# Altium PCB Motor_Driver_Model_D203.PcbDoc (part 3 of 4)
Units mm, origin at the board's own origin, x right, y up, seen from the top; angles counter-clockwise.
Board outline 50 x 35 mm, 4 copper layers (1-SIG-TOP, 2-SIG-GND, 3-SIG-PWR, 4-SIG-BOT), stack 0.96 mm thick; 141 components, 74 nets, 356 pads, 1049 vias.
Unrouted connection lines stored in the file: 1.
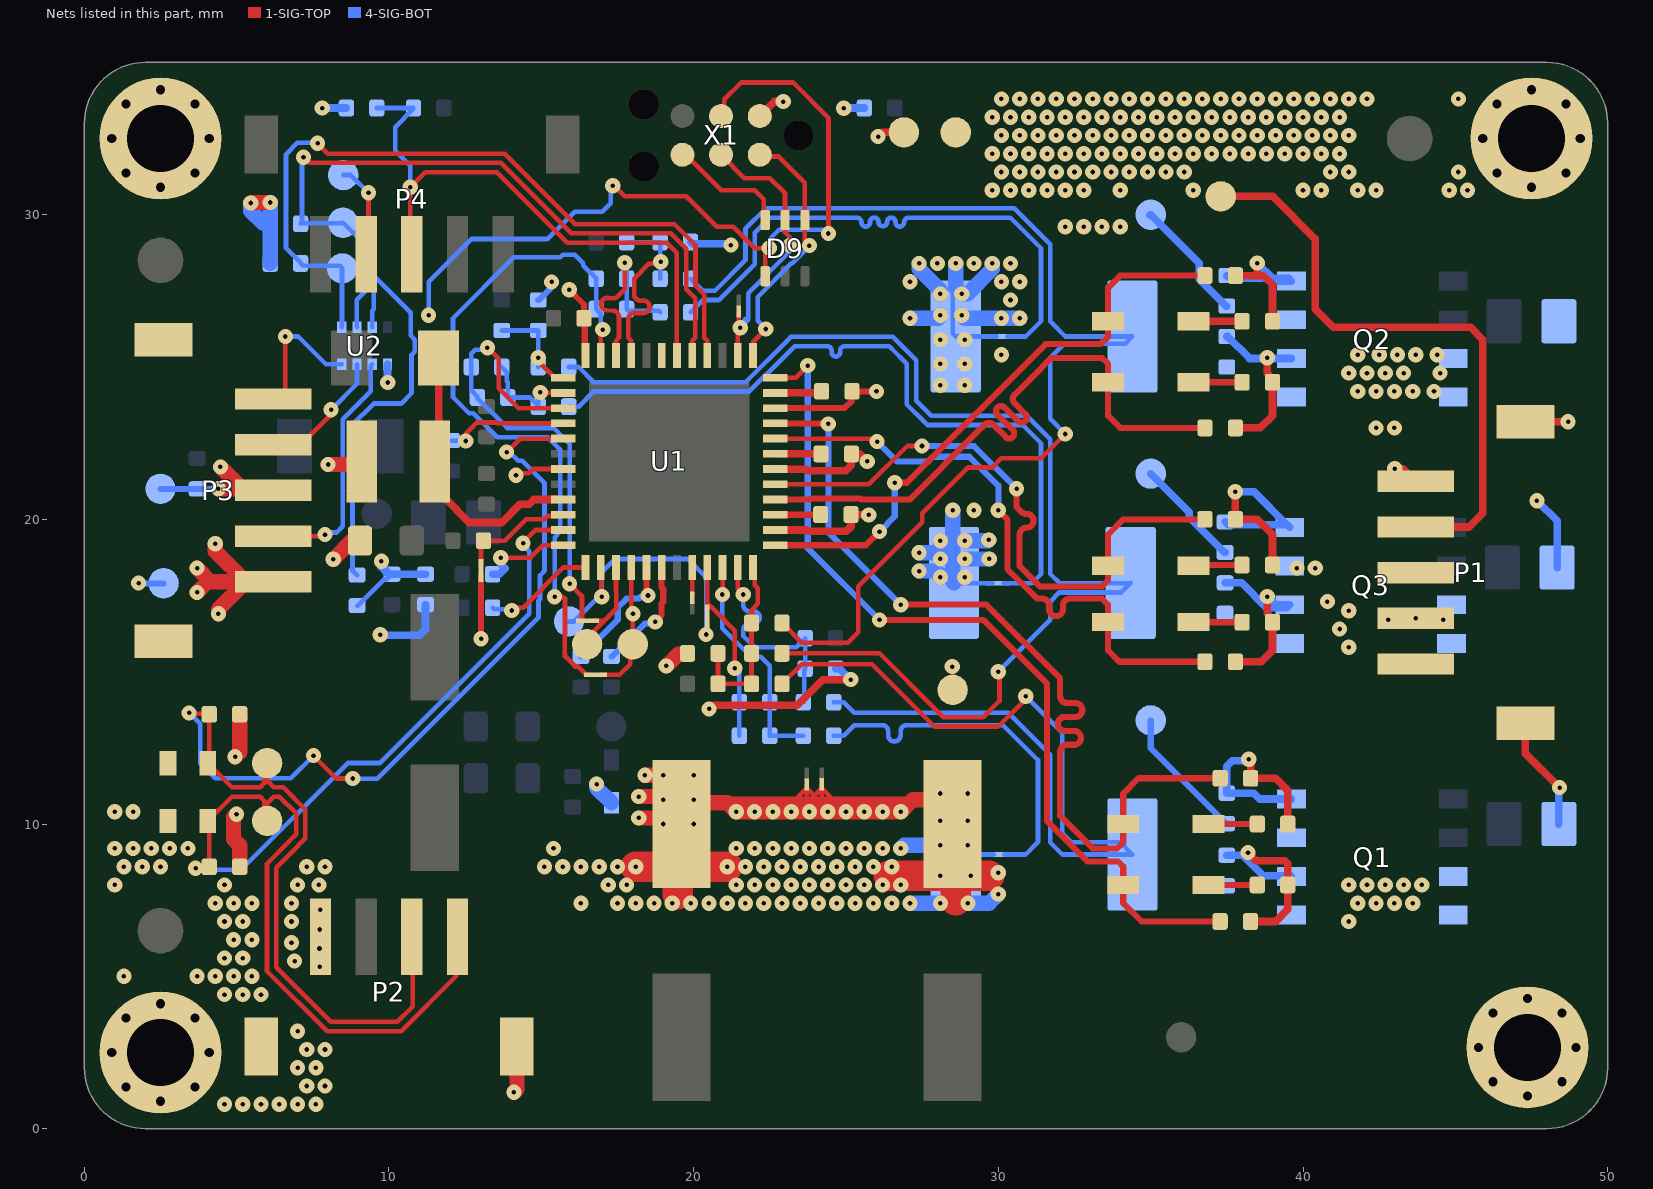
[diagram p4: the nets of this part, all layers, seen from the top]

## Part data (continued)
R26 R41 R44 R45: library part "RES SMD 0 OHM JUMPER 1/16W 0402", "0 Ohms Jumper 0.063W, 1/16W Chip Resistor 0402 (1005 Metric) Moisture Resistant Thick Film", Case Code (Imperial)=0402, Case Code (Metric)=1005, Manufacturer=Yageo, Manufacturer Part Number=RC0402JR-070RL, Max Operating Temperature=155°C, Max Power Dissipation=63mW, Min Operating Temperature=-55°C, Package Quantity=1, Power Rating=62.5mW, Supplier Part Number 1=311-0.0JRCT-ND, Temperature Coefficient=200ppm/°C, Tolerance=5%, Voltage Rating=50V, Case/Package=0402, ClassName=USB_SW, ComponentLink1Description=http://www.yageo.com/documents/recent/PYu-RC_Group_51_RoHS_L_10.pdf?src-supplier=Digi-Key, ComponentLink1URL=http://www.yageo.com/documents/recent/PYu-RC_Group_51_RoHS_L_10.pdf?src-supplier=Digi-Key, ComponentLink2Description=http://www.yageo.com/documents/recent/PYu-RC0402_51_RoHS_L_6.pdf?src-supplier=Avnet+Europe, ComponentLink2URL=http://www.yageo.com/documents/recent/PYu-RC0402_51_RoHS_L_6.pdf?src-supplier=Avnet+Europe, ComponentLink3Description=http://www.farnell.com/datasheets/1018594.pdf?src-supplier=Element14, ComponentLink3URL=http://www.farnell.com/datasheets/1018594.pdf?src-supplier=Element14, ComponentLink4Description=https://www.verical.com/server-webapp/html/getDatasheet?partID=326379&src-supplier=Verical, ComponentLink4URL=https://www.verical.com/server-webapp/html/getDatasheet?partID=326379&src-supplier=Verical, ComponentLink5Description=http://www.farnell.com/datasheets/2167052.pdf?src-supplier=Element14, ComponentLink5URL=http://www.farnell.com/datasheets/2167052.pdf?src-supplier=Element14, Composition="Thick Film", Contact Plating=Tin,Matte, Depth=0.5mm, Features="Moisture Resistant", Height=0.016inch, Lead Free="Lead Free", Length=1mm, Military Standard=Not, Mount="Surface Mount", Number of Terminations=2, Packaging="Tape and Reel", Pricing 1="1=0.1, 10=0.013, 25=0.0092, 50=0.0072, 100=0.0053, 250=0.004, 500=0.0032, 1000=0.0024, 5000=0.0017 (USD)", Radiation Hardening=No, REACH SVHC=Unknown, Stock 1=46057148, Supplier 1=Digi-Key, Termination=SMD/SMT, Width=0.02inch
R27 R28 R30: library part "RES SMD 1K OHM 1% 1/16W 0402", "13.7 kOhms ±1% 0.100W, 1/10W Chip Resistor 0402 (1005 Metric) Moisture Resistant Thick Film", Case Code (Imperial)=0402, Case Code (Metric)=1005, Manufacturer="Panasonic Electronic Components", Manufacturer Part Number=ERJ-2RKF1372X, Max Operating Temperature=155°C, Min Operating Temperature=-55°C, Power Rating=100mW, Resistance=13.7kR, Supplier Part Number 1=P13.7KLDKR-ND, Temperature Coefficient=100ppm/°C, Tolerance=1%, Voltage Rating=50V, Case/Package=0402, Composition="Thick Film", Datasheet=https://industrial.panasonic.com/cdbs/www-data/pdf/RDA0000/AOA0000C304.pdf, Depth=0.5mm, Height=0.32mm, Lead Free="Lead Free", Length=1mm, Military Standard=Not, Mount="Surface Mount", Number of Pins=2, Packaging="Tape and Reel", Pricing 1="1=0.1, 10=0.015, 100=0.0062, 1000=0.0028, 2500=0.0024, 5000=0.002 (USD)", REACH SVHC=Unknown, Stock 1=9574509, Supplier 1=Digi-Key, Termination=SMD/SMT, Voltage Rating (DC)=50V, Width=0.5mm
R31: library part "RES SMD 2.2 OHM 1% 1/16W 0402", "24.3 kOhms ±1% 0.100W, 1/10W Chip Resistor 0402 (1005 Metric) Moisture Resistant Thick Film", Case Code (Imperial)=0402, Case Code (Metric)=1005, Manufacturer="Panasonic Electronic Components", Manufacturer Part Number=ERJ-2RKF2432X, Max Operating Temperature=155°C, Min Operating Temperature=-55°C, Power Rating=100mW, Resistance=24.3kR, Supplier Part Number 1=P24.3KLCT-ND, Temperature Coefficient=200ppm/°C, Tolerance=1%, Voltage Rating=50V, Case/Package=0402, Composition="Thick Film", Datasheet=https://industrial.panasonic.com/cdbs/www-data/pdf/RDA0000/AOA0000C304.pdf, Depth=0.5mm, Height=0.32mm, Lead Free="Lead Free", Length=1mm, Mount="Surface Mount", Number of Pins=2, Packaging="Tape and Reel", Pricing 1="1=0.1, 10=0.023, 100=0.0093, 1000=0.0042, 2500=0.0036, 5000=0.003 (USD)", REACH SVHC="No SVHC", Stock 1=552576, Supplier 1=Digi-Key, Termination=SMD/SMT, Voltage Rating (DC)=50V, Width=0.5mm
R32 R35 R36 R37 R38 R39: "10 Ohms ±1% 0.063W, 1/16W Chip Resistor 0402 (1005 Metric) Automotive AEC-Q200, Moisture Resistant Thick Film", Case Code (Imperial)=0402, Case Code (Metric)=1005, Manufacturer=Yageo, Manufacturer Part Number=AC0402FR-0710RL, Max Operating Temperature=155°C, Max Power Dissipation=63mW, Min Operating Temperature=-55°C, Power Rating=62.5mW, Resistance="10 Ohm", Supplier Part Number 1=YAG3438CT-ND, Temperature Coefficient=200ppm/°C, Tolerance=1%, Voltage Rating=50V, Case/Package=0402, ClassName=STM32G473CETx, ComponentLink1Description=http://www.yageo.com/documents/recent/PYu-AC_51_RoHS_L_2_revised.pdf?src-supplier=Future+Electronics, ComponentLink1URL=http://www.yageo.com/documents/recent/PYu-AC_51_RoHS_L_2_revised.pdf?src-supplier=Future+Electronics, ComponentLink2Description=http://www.yageo.com/NewPortal/yageodocoutput?fileName=/pdf/R-Chip/PYu-AC_51_RoHS_L_6.pdf&src-supplier=Digi-Key, ComponentLink2URL=http://www.yageo.com/NewPortal/yageodocoutput?fileName=/pdf/R-Chip/PYu-AC_51_RoHS_L_6.pdf&src-supplier=Digi-Key, ComponentLink3Description=http://www.mouser.com/ds/2/447/yageodocoutput-1111992.pdf?src-supplier=Mouser, ComponentLink3URL=http://www.mouser.com/ds/2/447/yageodocoutput-1111992.pdf?src-supplier=Mouser, Composition="Thick Film", Features="Moisture Resistant,Automotive AEC-Q200", Height=0.015inch, Lead Free="Lead Free", Length=0.039inch, Mount="Surface Mount", Number of Terminations=2, Packaging="Tape and Reel", Pricing 1="1=0.1, 10=0.03, 100=0.012, 1000=0.0054, 2500=0.0047, 5000=0.0039 (USD)", Stock 1=212882, Supplier 1=Digi-Key, Termination=SMD/SMT, Width=0.02inch
R33: library part "RES SMD 2.26 OHM 1% 1/10W 0603", "169 kOhms ±1% 0.125W, 1/8W Chip Resistor 0603 (1608 Metric) Automotive AEC-Q200 Thick Film", Case Code (Imperial)=0603, Case Code (Metric)=1608, Manufacturer="Vishay Dale", Manufacturer Part Number=TNPW0603169KBEEA, Max Operating Temperature=155°C, Max Power Dissipation=125mW, Min Operating Temperature=-55°C, Package Quantity=5000, Resistance=169kR, Supplier Part Number 1=541-4530-1-ND, Temperature Coefficient=100ppm/°C, Tolerance=1%, Voltage Rating=75V, Case/Package=0603, Composition="Thick Film", Contact Plating=Tin, Datasheet=https://www.vishay.com/docs/28758/tnpw_e3.pdf, Depth=0.85mm, Features="Automotive AEC-Q200", Height=0.02inch, Lead Free="Lead Free", Length=1.55mm, Military Standard=Not, Mount="Surface Mount", Number of Terminations=2, Packaging="Tape and Reel", Power Rating=125mW, Pricing 1="1=0.1, 10=0.04, 100=0.0164, 1000=0.0074, 2500=0.0064 (USD)", Radiation Hardening=No, Stock 1=18141, Supplier 1=Digi-Key, Termination=SMD/SMT, Weight=7.1E-05oz, Width=0.85mm
R34: library part "RES SMD 2.26 OHM 1% 1/10W 0603", "9.31 kOhms ±1% 0.125W, 1/8W Chip Resistor 0603 (1608 Metric) Automotive AEC-Q200 Thick Film", Case Code (Imperial)=0603, Case Code (Metric)=1608, Manufacturer="Vishay Dale", Manufacturer Part Number=TNPW06039K31BEEA, Max Operating Temperature=155°C, Max Power Dissipation=125mW, Min Operating Temperature=-55°C, Package Quantity=5000, Resistance=9.31kR, Supplier Part Number 1=541-TNPW06039K31BEEACT-ND, Temperature Coefficient=100ppm/°C, Tolerance=1%, Voltage Rating=75V, Case/Package=0603, Composition="Thick Film", Contact Plating=Tin, Datasheet=https://www.vishay.com/docs/28758/tnpw_e3.pdf, Depth=0.85mm, Features="Automotive AEC-Q200", Height=0.02inch, Lead Free="Lead Free", Length=1.55mm, Military Standard=Not, Mount="Surface Mount", Number of Terminations=2, Packaging="Tape and Reel", Power Rating=125mW, Pricing 1="1=0.1, 10=0.04, 100=0.0164, 1000=0.0074, 2500=0.0064 (USD)", Radiation Hardening=No, Stock 1=18141, Supplier 1=Digi-Key, Termination=SMD/SMT, Weight=7.1E-05oz, Width=0.85mm
R40: "10 kOhms ±1% 0.063W, 1/16W Chip Resistor 0402 (1005 Metric) Moisture Resistant Thick Film", Case Code (Imperial)=0402, Case Code (Metric)=1005, Manufacturer=Yageo, Manufacturer Part Number=RC0402FR-0710KP, Max Operating Temperature=155°C, Max Power Dissipation=63mW, Min Operating Temperature=-55°C, Resistance=10kR, Supplier Part Number 1=YAG1249CT-ND, Temperature Coefficient=150ppm/°C, Tolerance=1%, Case/Package=0402, ComponentLink1Description=http://www.yageo.com/NewPortal/yageodocoutput?fileName=/pdf/R-Chip/PYu-RC_51_RoHS_P_0.pdf&src-supplier=Digi-Key, ComponentLink1URL=http://www.yageo.com/NewPortal/yageodocoutput?fileName=/pdf/R-Chip/PYu-RC_51_RoHS_P_0.pdf&src-supplier=Digi-Key, Composition="Thick Film", Features="Moisture Resistant", Height=0.016inch, Length=0.039inch, Mount="Surface Mount", Number of Terminations=2, Packaging="Tape and Reel", Pricing 1="1=0.1, 10=0.035, 100=0.014, 1000=0.0063, 2500=0.0055, 5000=0.0045 (USD)", Stock 1=839368, Supplier 1=Digi-Key, Width=0.02inch
R42: "100 Ohms ±1% 0.063W, 1/16W Chip Resistor 0402 (1005 Metric) Moisture Resistant Thick Film", Case Code (Imperial)=0402, Case Code (Metric)=1005, Manufacturer=Yageo, Manufacturer Part Number=RC0402FR-07100RL, Max Operating Temperature=155°C, Min Operating Temperature=-55°C, Power Rating=62.5mW, Resistance=100R, Supplier Part Number 1=311-100LRDKR-ND, Temperature Coefficient=100ppm/°C, Tolerance=1%, Voltage Rating=50V, Case/Package=0402, ComponentLink1Description=http://www.farnell.com/datasheets/2167052.pdf?src-supplier=Element14, ComponentLink1URL=http://www.farnell.com/datasheets/2167052.pdf?src-supplier=Element14, ComponentLink2Description=http://www.yageo.com/documents/recent/PYu-RC_Group_51_RoHS_L_9.pdf?src-supplier=Mouser, ComponentLink2URL=http://www.yageo.com/documents/recent/PYu-RC_Group_51_RoHS_L_9.pdf?src-supplier=Mouser, ComponentLink3Description=http://www.yageo.com/documents/recent/PYu-RC0402_51_RoHS_L_6_r.pdf?src-supplier=Future+Electronics, ComponentLink3URL=http://www.yageo.com/documents/recent/PYu-RC0402_51_RoHS_L_6_r.pdf?src-supplier=Future+Electronics, ComponentLink4Description=https://www.verical.com/server-webapp/html/getDatasheet?partID=329466&src-supplier=Verical, ComponentLink4URL=https://www.verical.com/server-webapp/html/getDatasheet?partID=329466&src-supplier=Verical, ComponentLink5Description=http://www.farnell.com/datasheets/1018594.pdf?src-supplier=Element14, ComponentLink5URL=http://www.farnell.com/datasheets/1018594.pdf?src-supplier=Element14, ComponentLink6Description=http://documents.rs-components.com/techlib://itc_doclist_GB.htm?stockno=6185810&src-supplier=RSComponents, ComponentLink6URL=http://documents.rs-components.com/techlib://itc_doclist_GB.htm?stockno=6185810&src-supplier=RSComponents, Composition="Thick Film", Depth=0.5mm, Height=0.32mm, Lead Free="Lead Free", Length=1mm, Military Standard=Not, Mount="Surface Mount", Number of Pins=2, Packaging="Tape and Reel", Pricing 1="1=0.1, 10=0.016, 100=0.0064, 1000=0.0029, 2500=0.0025, 5000=0.0021 (USD)", REACH SVHC="No SVHC", Stock 1=16989760, Supplier 1=Digi-Key, Termination=SMD/SMT, Voltage Rating (DC)=50V, Width=0.5mm
R43: library part "RES SMD 54.9K OHM 1% 1/16W 0402", "39 kOhms ±1% 0.100W, 1/10W Chip Resistor 0402 (1005 Metric) Moisture Resistant Thick Film", Case Code (Imperial)=0402, Case Code (Metric)=1005, Manufacturer="Panasonic Electronic Components", Manufacturer Part Number=ERJ-2RKF3902X, Max Operating Temperature=155°C, Max Power Dissipation=100mW, Min Operating Temperature=-55°C, Resistance=39kR, Supplier Part Number 1=P39.0KLCT-ND, Temperature Coefficient=100ppm/°C, Tolerance=1%, Voltage Rating=50V, Case/Package=0402, Composition="Thick Film", Contact Plating=Tin,Matte, Datasheet=https://industrial.panasonic.com/cdbs/www-data/pdf/RDA0000/AOA0000C304.pdf, Depth=0.5mm, Features="Moisture Resistant", Height=0.016inch, Lead Free="Lead Free", Length=1mm, Military Standard=Not, Mount="Surface Mount", Number of Terminations=2, Packaging="Tape and Reel", Power Rating=100mW, Pricing 1="1=0.1, 10=0.015, 100=0.0062, 1000=0.0028, 2500=0.0024, 5000=0.002 (USD)", Stock 1=707322, Supplier 1=Digi-Key, Termination=SMD/SMT, Voltage Rating (DC)=50V, Width=0.02inch
R46 R47 R48 R49 R50 R51: "75 kOhms ±1% 0.063W, 1/16W Chip Resistor 0402 (1005 Metric) Automotive AEC-Q200 Thick Film", Case Code (Imperial)=0402, Case Code (Metric)=1005, Manufacturer="Stackpole Electronics", Manufacturer Part Number=RMCF0402FT75K0, Max Operating Temperature=155°C, Max Power Dissipation=63mW, Min Operating Temperature=-55°C, Resistance=75kR, Supplier Part Number 1=RMCF0402FT75K0CT-ND, Temperature Coefficient=100ppm/°C, Tolerance=1%, Case/Package=0402, ClassName=STM32G473CETx, ComponentLink1Description=https://www.seielect.com/catalog/SEI-Packaging.pdf?src-supplier=Digi-Key, ComponentLink1URL=https://www.seielect.com/catalog/SEI-Packaging.pdf?src-supplier=Digi-Key, ComponentLink2Description=http://www.seielect.com/Catalog/Sei-RMC.pdf?src-supplier=Future+Electronics, ComponentLink2URL=http://www.seielect.com/Catalog/Sei-RMC.pdf?src-supplier=Future+Electronics, ComponentLink3Description=https://www.seielect.com/catalog/SEI-RMCF_RMCP.pdf?src-supplier=Avnet, ComponentLink3URL=https://www.seielect.com/catalog/SEI-RMCF_RMCP.pdf?src-supplier=Avnet, ComponentLink4Description=http://components.arrow.com/part/dataview/47811039S7743759N1174?src-supplier=Arrow, ComponentLink4URL=http://components.arrow.com/part/dataview/47811039S7743759N1174?src-supplier=Arrow, ComponentLink5Description=https://www.verical.com/server-webapp/html/getDatasheet?partID=492569&src-supplier=Verical, ComponentLink5URL=https://www.verical.com/server-webapp/html/getDatasheet?partID=492569&src-supplier=Verical, Composition="Thick Film", Contact Plating=Tin,Matte, Depth=0.5mm, Features="Automotive AEC-Q200", Height=0.016inch, Lead Free="Lead Free", Length=0.039inch, Military Standard=Not, Mount="Surface Mount", Number of Terminations=2, Packaging="Tape and Reel", Power Rating=63mW, Pricing 1="1=0.1, 10=0.014, 100=0.0058, 1000=0.0026, 2500=0.0023, 5000=0.0019 (USD)", Radiation Hardening=No, Stock 1=24693, Supplier 1=Digi-Key, Width=0.02inch
R52 R53 R54 R55 R56: "0 Ohms Jumper 0.063W, 1/16W Chip Resistor 0402 (1005 Metric) Moisture Resistant Thick Film", Case Code (Imperial)=0402, Case Code (Metric)=1005, Manufacturer=Yageo, Manufacturer Part Number=RC0402JR-070RL, Max Operating Temperature=155°C, Max Power Dissipation=63mW, Min Operating Temperature=-55°C, Package Quantity=1, Power Rating=62.5mW, Resistance="0 Ohm", Supplier Part Number 1=311-0.0JRCT-ND, Temperature Coefficient=200ppm/°C, Tolerance=5%, Voltage Rating=50V, Case/Package=0402, ClassName=USB_SW, ComponentLink1Description=http://www.yageo.com/documents/recent/PYu-RC_Group_51_RoHS_L_10.pdf?src-supplier=Digi-Key, ComponentLink1URL=http://www.yageo.com/documents/recent/PYu-RC_Group_51_RoHS_L_10.pdf?src-supplier=Digi-Key, ComponentLink2Description=http://www.yageo.com/documents/recent/PYu-RC0402_51_RoHS_L_6.pdf?src-supplier=Avnet+Europe, ComponentLink2URL=http://www.yageo.com/documents/recent/PYu-RC0402_51_RoHS_L_6.pdf?src-supplier=Avnet+Europe, ComponentLink3Description=http://www.farnell.com/datasheets/1018594.pdf?src-supplier=Element14, ComponentLink3URL=http://www.farnell.com/datasheets/1018594.pdf?src-supplier=Element14, ComponentLink4Description=https://www.verical.com/server-webapp/html/getDatasheet?partID=326379&src-supplier=Verical, ComponentLink4URL=https://www.verical.com/server-webapp/html/getDatasheet?partID=326379&src-supplier=Verical, ComponentLink5Description=http://www.farnell.com/datasheets/2167052.pdf?src-supplier=Element14, ComponentLink5URL=http://www.farnell.com/datasheets/2167052.pdf?src-supplier=Element14, Composition="Thick Film", Contact Plating=Tin,Matte, Depth=0.5mm, Features="Moisture Resistant", Height=0.016inch, Lead Free="Lead Free", Length=1mm, Military Standard=Not, Mount="Surface Mount", Number of Terminations=2, Packaging="Tape and Reel", Pricing 1="1=0.1, 10=0.013, 25=0.0092, 50=0.0072, 100=0.0053, 250=0.004, 500=0.0032, 1000=0.0024, 5000=0.0017 (USD)", Radiation Hardening=No, REACH SVHC=Unknown, Stock 1=46057148, Supplier 1=Digi-Key, Termination=SMD/SMT, Width=0.02inch
U1: "No Description Available", Manufacturer=STMicroelectronics, Supplier Part Number 1=43AC0300, Built_By=EMA_Jessica, ComponentLink1Description=Datasheet, ComponentLink1URL=https://www.google.com/url?sa=t&rct=j&q=&esrc=s&source=web&cd=&ved=2ahUKEwjgwpfom8rwAhVUb30KHfxED0oQFjAAegQIBhAD&url=https%3A%2F%2Fwww.st.com%2Fresource%2Fen%2Fdatasheet%2Fstspin32f0a.pdf&usg=AOvVaw3no-3pqo9JeAS3_K3kXbhn, ComponentLink2Description="Evaluation Board Schematic", ComponentLink2URL=https://www.st.com/content/ccc/resource/technical/layouts_and_diagrams/schematic_pack/group0/a9/20/bf/a8/9b/aa/43/2b/STEVAL-SPIN3202_schematics/files/steval-spin3202_schematic.pdf/jcr:content/translations/en.steval-spin3202_schematic.pdf, Copyright="Copyright (C) 2018 Accelerated Designs. All rights reserved", EVAL Kit=STEVAL-SPIN3202, Manufacturer Part Number=STSPIN32F0A, SourceLibrary=Update_to_database_2020-12-04, Supplier 1=Newark
U2: library part "FILTER RC(PI) ESD SMD  8-UFDFN EP", "RC (Pi) EMI Filter 2nd Order Low Pass 3 Channel R = 47Ohms, 100Ohms, C = 20pF  8-UFDFN Exposed Pad", Capacitance=20pF, Case/Package=SMD/SMT, Clamping Voltage=10V, Frequency=308MHz, Manufacturer="Texas Instruments", Max Operating Temperature=85°C, Min Operating Temperature=-40°C, Operating Supply Voltage=5.5V, Package Quantity=1, Supplier Part Number 1=296-28299-1-ND, ComponentLink1Description=http://www.ti.com/lit/ds/symlink/tpd3f303.pdf?src-supplier=Digi-Key, ComponentLink1URL=http://www.ti.com/lit/ds/symlink/tpd3f303.pdf?src-supplier=Digi-Key, ComponentLink2Description=http://focus.ti.com/lit/ds/symlink/tpd3f303.pdf?src-supplier=Avnet+Europe, ComponentLink2URL=http://focus.ti.com/lit/ds/symlink/tpd3f303.pdf?src-supplier=Avnet+Europe, ComponentLink3Description=https://www.verical.com/server-webapp/html/getDatasheet?partID=302817&src-supplier=Verical, ComponentLink3URL=https://www.verical.com/server-webapp/html/getDatasheet?partID=302817&src-supplier=Verical, ComponentLink4Description=http://www.farnell.com/datasheets/1558442.pdf?src-supplier=Element14, ComponentLink4URL=http://www.farnell.com/datasheets/1558442.pdf?src-supplier=Element14, Contact Plating=Gold, Depth=1.7mm, ESD Protection=Yes, Height=0.026inch, Lead Free="Lead Free", Length=2.2mm, Manufacturer Part Number=TPD3F303DPVR, Mount="Surface Mount", Number of Channels=3, Number of Pins=8, Packaging="Tape and Reel", Pricing 1="1=0.85, 10=0.812, 25=0.7856, 50=0.6414, 100=0.576, 250=0.5236, 500=0.4974, 1000=0.4451 (USD)", Radiation Hardening=No, REACH SVHC="No SVHC", Stock 1=4896, Supplier 1=Digi-Key, Termination=Flat, Width=0.063inch
X1: library part TC2030-IDC-NL, "Tag-Connect TC2030-MCP-NL (3x2 pins No Legs)", Manufacturer="Tag-Connect LLC", Manufacturer Part Number=TC2030-IDC-NL
G1 Logo1: ClassName=PCB_FEATURE

## Via types
v1: diameter 0.5, hole 0.15, 1-SIG-TOP to 4-SIG-BOT, tented both sides, 1016 vias
v2: diameter 0.605, hole 0.3, 1-SIG-TOP to 4-SIG-BOT, tented both sides, 32 vias
v3: diameter 0.5, hole 0.15, 1-SIG-TOP to 4-SIG-BOT, 1 vias

## Nets (pads, with @x,y where several pads share a name; then routed paths per layer and width w, separated by ;. In a path a pad name is that pad's centre, name@x,y a point inside that pad or via, vN(x,y) a via of type N, cw(c..) or ccw(c..) an arc to the next point about the centre after c; other vN are vias at no path point)
+3V3: 3V31.1 3V32.1 C10.2 C15.2 C20.2 C23.2 D7.1 L1.1 NT7.1 P3.3 R18.2 R19.2 R20.2 R22.2 R25.2 R31.2 R41.2 R43.2 R44.2 R45.2 U1.48 U2.5 X1.1 | length 36.6
  1-SIG-TOP w0.2: NT7.1@13.02,18.144 13.02,17.603 13.023,17.6 ; v1(13.023,16.079) 13.023,17.6 ; 13.023,17.777 13.023,17.6 ; v1(15.919,27.533) 16.4,27.052 C15.2@16.4,26.6 16.425,26.575 16.425,25.405 U1.48@16.45,25.38
  1-SIG-TOP w0.25: v1(20.505,13.776) 20.629,13.9 23.4,13.9 24.24,14.74 v1(25.159,14.74) ; X1.1@22.17,33.235 22.648,33.713 v1(22.937,33.713) ; v1(26.054,32.563) 26.192,32.7 3V32.1@26.9,32.7
  1-SIG-TOP w0.5: v1(4.4,21) P3.3@5.187,21 ; v1(4.466,21.721) P3.3@5.187,21 ; v1(4.947,12.204) 5.1,12.357 R44.2@5.1,13.6 ; v1(4.994,10.322) 4.9,10.228 4.9,9.5 5.1,9.3 R45.2@5.1,8.6 ; v1(5.461,30.383) 5.478,30.4 v1(6.1,30.4) ; v1(8,21.8) 9,21.8 L1.1@9.1,21.9 9.1,21.2 L1.1@8.85,20.95 ; v1(8.171,18.688) 8.783,19.3 C10.2@9.05,19.3 C10.2@9.075,19.325 ; v1(19.1,15.19) 19.188,15.277 19.203,15.277 19.501,15.575 19.8,15.575 R31.2@19.8,15.6 ; P3.3@5.187,21 5.237,20.95 P3.3@6.2,20.95 6.15,21 P3.3@5.187,21
  4-SIG-BOT w0.2: 3V31.1@2.5,21 C23.2@3.7,21 v1(4.4,21) ; R20.2@14.9,27.2 14.925,27.2 15.278,27.553 15.278,27.734 v1(15.336,27.791)
  4-SIG-BOT w0.25: v1(7.812,33.497) 7.814,33.5 R41.2@8.6,33.5 ; v1(9.714,16.209) 9.723,16.2 11,16.2 11.2,16.4 R43.2@11.2,17.2 ; U2.5@9.95,25.09 9.95,24.501 v1(9.96,24.491) ; R25.2@19.9,29.1 19.952,29.048 21.174,29.048 v1(21.221,29) ; R22.2@24.659,15.098 24.801,15.098 v1(25.159,14.74) ; v1(24.923,33.495) 24.927,33.5 C20.2@25.6,33.5
  4-SIG-BOT w0.5: v1(5.461,30.383) 5.461,30.12 5.855,29.725 R18.2@6.1,29.725 ; R19.2@6.1,28.4 R18.2@6.1,29.7 R18.2@6.1,29.725 ; v1(6.1,30.4) R18.2@6.1,29.725 ; v1(16.813,11.31) 16.813,11.187 D7.1@17.3,10.7
BLDC_NTC: NTC.1 P1.4 | length 20
  1-SIG-TOP w0.25: NTC.1@37.325,30.625 NTC.1@37.3,30.6 39,30.6 40.4,29.2 40.4,26.9 41,26.3 45.5,26.3 45.9,25.9 45.9,20.2 45.45,19.75 P1.4@43.7,19.75
BLDC_U: C17.2 P1.1 Q1.1S Q1.2D-A Q1.2D-B R51.2 U1.34 U.1 | length 8.2
  1-SIG-TOP w0.203: U1.34@22.68,23.65 24.95,23.65 25.2,23.9 C17.2@25.2,24.2 v1(26,24.2)
  4-SIG-BOT w0.203: U.1@35,13.4 35,12.487 37.475,10.012 R51.2@37.5,10.012
  other v1: 41.5,6.8 41.8,7.4 42.4,7.4 43,7.4 43.6,7.4 41.5,8 42.1,8 42.7,8 43.3,8 43.9,8
BLDC_V: C18.1 P1.2 Q3.1S Q3.2D-A Q3.2D-B R49.2 U1.30 V.1 | length 7.2
  1-SIG-TOP w0.25: U1.30@22.68,21.65 23.698,21.65 23.755,21.594 24.994,21.594 25.178,21.778 C18.1@25.178,22.146 25.454,22.146 v1(25.7,21.9)
  4-SIG-BOT w0.25: V.1@35,21.5 36.269,20.231 36.269,20.064 37.418,18.915 R49.2@37.443,18.915
  other v1: 41.5,15.8 41.2,16.4 42.8,16.7 44.6,16.7 43.7,16.75 41.5,17 40.8,17.3 39.8,18.4 40.4,18.4
BLDC_W: C19.1 P1.3 Q2.1S Q2.2D-A Q2.2D-B R47.2 U1.26 W.1 | length 7.6
  1-SIG-TOP w0.25: U1.26@22.68,19.65 23.696,19.65 23.743,19.604 25.004,19.604 25.164,19.764 C19.1@25.164,20.156 25.736,20.156 v1(25.745,20.146) v1(25.745,20.146)
  4-SIG-BOT w0.25: W.1@34.975,29.975 W.1@35,30 36.6,28.4 36.6,27.875 37.475,27 R47.2@37.5,27
  other v1: 42.4,23 43,23 41.8,24.2 42.4,24.2 43,24.2 43.6,24.2 44.3,24.2 41.5,24.8 42.1,24.8 42.7,24.8 43.3,24.8 44.5,24.8 41.8,25.4 42.5,25.4 43.1,25.4 43.7,25.4 44.4,25.4
BOOT_MODE: P4.3 R40.1 R41.1 U1.42 | length 19.9
  1-SIG-TOP w0.152: P4.3@10.75,28.7 10.7,28.75 v1(10.7,30.9) 11.195,31.395 13.543,31.395 15.857,29.081 19.119,29.081 19.45,28.75 U1.42@19.45,25.38
  4-SIG-BOT w0.152: R41.1@9.6,33.5 R40.1@10.8,33.5 10.8,33.475 10.2,32.875 10.2,32.1 10.7,31.6 v1(10.7,30.9)
CTRL: CTRL.1 D11.1 P2.4 R45.1 U1.11 | length 40
  1-SIG-TOP w0.152: v1(3.651,8.55) 3.676,8.575 4.075,8.575 R45.1@4.1,8.6 4.1,10.05 D11.1@4.05,10.1 4.848,10.898 5.769,10.898 5.914,10.752 5.914,10.186 CTRL.1@6,10.1 6,10.676 6.221,10.898 6.402,10.898 6.95,10.35 6.95,9.658 6.717,9.425 6.717,9.417 5.995,8.695 5.995,5.174 7.969,3.2 10.4,3.2 12.2,5 12.2,6.25 P2.4@12.25,6.3 ; v1(14.4,19.218) 14.4,19.249 14.799,19.648 U1.11@15.72,19.65 U1.11@15.72,19.65
  4-SIG-BOT w0.152: v1(3.651,8.55) 3.604,8.597 3.55,8.597 3.647,8.5 5.142,8.5 8.642,12 9.7,12 14.6,16.9 14.6,18.955 14.4,19.155 v1(14.4,19.218)
GND: C1.1 C2.1 C3.1 C21.2 C22.2 D10.2 D11.2 GND1.1 GND2.1 GND.1 MNT1.1 MNT2.1 MNT3.1 MNT4.1 NT1.2 NT2.2 NT3.2 NT10.2 NT11.2 P1.5 P1.S1 P1.S2 P2.1 P2.S1 P2.S2 P3.5 P3.S1 P3.S2 R9.1 R10.1 R15.1 | length 92.2
  1-SIG-TOP w0.152: v1(20,10.8) 20.044,10.756 20.1,10.7 20.3,10.7 23.6,10.7 ; 23.432,10.8 23.432,10.891 NT11.2@23.711,11.17 ; NT11.2@23.711,11.297 NT11.2@23.711,11.17 ; NT10.2@24.2,11.3 NT10.2@24.2,11.173 ; 24.479,10.8 24.479,10.894 NT10.2@24.2,11.173 ; v1(28.49,15.167) 28.5,15.157 GND2.1@28.5,14.4 ; C22.2@28.5,10 27.8,10.7 27.1,10.7 24.3,10.7 ; 23.6,10.7 23.906,10.7 ; 23.6,10.7 23.656,10.756 23.7,10.8 23.711,10.811 NT11.2@23.711,11.17 ; NT11.2@23.711,11.17 23.906,10.976 23.906,10.879 ; 23.906,10.7 24.3,10.7 ; 23.906,10.7 23.906,10.756 23.906,10.8 23.906,10.879 ; 23.906,10.879 NT10.2@24.2,11.173 ; NT10.2@24.2,11.173 24.2,10.8 24.3,10.7
  1-SIG-TOP w0.2: C21.2@19.6,10 20.294,10.694 20.3,10.7 C21.2@20.356,10.756 ; C21.2@20.044,10.756 C21.2@20.356,10.756 ; C22.2@27.8,10.7 27.706,10.794 27.7,10.8 24.479,10.8 24.2,10.8 ; C21.2@20.356,10.756 23.656,10.756 23.906,10.756 24.156,10.756 24.2,10.8 ; C21.2@20.356,10.756 20.4,10.8 23.432,10.8 23.7,10.8 23.906,10.8 24.2,10.8
  1-SIG-TOP w0.25: v1(43.01,21.666) 43.284,21.666 P1.5@43.7,21.25 ; P1.S1@47.3,13.3 47.3,12.314 v1(48.421,11.194) ; P1.S2@47.3,23.2 v1(48.7,23.2)
  1-SIG-TOP w0.5: v1(3.7,17.6) 4.05,17.95 4.15,17.95 ; v1(3.7,18.4) 4.15,17.95 ; v1(4.3,19.2) 4.3,18.95 P3.5@5.3,17.95 ; v1(4.4,16.9) 4.4,17.05 P3.5@5.3,17.95 ; P3.5@6.2,17.95 P3.5@5.3,17.95 ; v1(14.102,1.192) 14.2,1.291 P2.S2@14.2,2.7 ; v1(18.2,10.2) 18.9,10.2 19,10.1 v1(19,10) ; v1(18.2,10.9) 18.9,10.9 v1(19,10.8) ; v1(18.4,11.6) v1(19,11.6) ; C21.2@20.1,10.7 20.106,10.694 20.294,10.694 21.105,10.694 v1(21.4,10.4) v1(22,10.4) v1(22.6,10.4) v1(23.2,10.4) v1(23.8,10.4) v1(24.4,10.4) v1(25,10.4) v1(25.6,10.4) v1(26.2,10.4) v1(26.8,10.4) 27.1,10.7 27.195,10.794 27.706,10.794 27.894,10.794 v1(28.1,11) ; 4.15,17.95 P3.5@5.3,17.95
  1-SIG-TOP w1: v1(18.1,8.6) 19.15,8.6 C21.2@19.473,8.923 ; 19.473,7.697 C21.2@19.473,8.923 ; v1(21.1,8.6) 20.05,8.6 C21.2@19.6,9.05 ; 26.4,8.3 v1(28.1,8.3) C22.2@28.6,8.3 ; C22.2@28.5,10 28.6,9.9 C22.2@28.6,8.3 ; 28.6,7.5 C22.2@28.6,8.3 ; 29.7,8.3 v1(29.1,8.3) C22.2@28.6,8.3 ; C21.2@19.473,8.923 19.473,9.873 C21.2@19.6,10 C21.2@19.6,9.05 ; C21.2@19.473,8.923 C21.2@19.6,9.05
  4-SIG-BOT w0.152: v1@28.5,28.3 28.5,26.1 R10.1@28.6,26 NT2.2@29.944,26 ; R9.1@28.6,9 NT1.2@29.844,9 ; R15.1@28.627,18 R15.1@28.543,17.915 28.558,17.9 NT3.2@29.81,17.9
  4-SIG-BOT w0.2: v1(1.782,17.908) 1.791,17.9 GND1.1@2.6,17.9
  4-SIG-BOT w0.25: v1(47.678,20.612) 48.343,19.947 C2.1@48.343,18.415 ; C1.1@48.4,10 48.4,11.173 v1(48.421,11.194)
  4-SIG-BOT w0.5: v1(26.8,8) 26.903,8.103 28.025,8.103 28.1,8.178 v1(28.1,8.3) ; v1(26.8,9.2) 26.9,9.3 v1(28.1,9.3) ; v1@27.1,7.4 v1(28.1,7.4) ; v1(27.1,26.6) 28.025,26.6 28.1,26.675 v1(28.1,26.7) ; v1(27.4,28.4) 27.4,28.215 28.1,27.515 v1(28.1,27.4) ; v1(27.4,18.3) 27.968,18.3 28.1,18.168 v1(28.1,18.1) ; v1(27.4,18.9) R15.1@27.968,18.9 ; v1(28.1,10.1) v1(28.1,11) ; v1(28.1,18.7) 28.1,18.768 R15.1@27.968,18.9 ; v1(28.1,19.3) 28.1,19.032 R15.1@27.968,18.9 ; v1(28.5,20.3) 28.5,17.958 R15.1@28.543,17.915 ; v1(28.6,28.4) 28.6,27.59 28.79,27.4 v1(28.8,27.4) 28.985,27.4 29.8,28.215 v1(29.8,28.4) ; v1(28.8,26.7) 28.9,26.6 v1(30.1,26.6) v1(30.7,26.6) ; v1(28.9,18.7) v1(29.7,18.7) ; v1(28.9,19.3) 29.663,19.3 v1(29.687,19.324) ; v1(29,7.4) 29.7,7.4 v1(30,7.7) ; v1(29.1,8.3) 29.1,8.325 29.175,8.4 v1(30,8.4)
  other v1: 4.6,0.8 5.2,0.8 5.8,0.8 6.4,0.8 7,0.8 7.6,0.8 7.3,1.4 7.9,1.4 7,2 7.6,2 7.3,2.6 7.9,2.6 7,3.2 4.6,4.4 5.2,4.4 5.8,4.4 1.3,5 3.7,5 4.3,5 4.9,5 5.5,5 7.73,5.314 6.9,5.5 4.6,5.6 5.2,5.6 7.719,5.914 6.8,6.1 4.9,6.2 5.5,6.2 7.724,6.537 4.6,6.8 5.2,6.8 6.8,6.8 7.741,7.181 4.3,7.4 4.9,7.4 5.5,7.4 6.8,7.4 16.3,7.4 17.5,7.4 18.1,7.4 18.7,7.4 19.3,7.4 19.9,7.4 20.5,7.4 21.1,7.4 21.7,7.4 22.3,7.4 22.9,7.4 23.5,7.4 24.1,7.4 24.7,7.4 25.3,7.4 25.9,7.4 26.5,7.4 27.1,7.4 1,8 4.6,8 7,8 7.7,8 17.2,8 17.8,8 21.4,8 22,8 22.6,8 23.2,8 23.8,8 24.4,8 25,8 25.6,8 26.2,8 1.3,8.6 1.9,8.6 2.5,8.6 7.3,8.6 7.9,8.6 15.1,8.6 15.7,8.6 16.3,8.6 16.9,8.6 17.5,8.6 21.7,8.6 22.3,8.6 22.9,8.6 23.5,8.6 24.1,8.6 24.7,8.6 25.3,8.6 25.9,8.6 26.5,8.6 1,9.2 1.6,9.2 2.2,9.2 2.8,9.2 3.4,9.2 15.4,9.2 21.4,9.2 22,9.2 22.6,9.2 23.2,9.2 23.8,9.2 24.4,9.2 25,9.2 25.6,9.2 26.2,9.2 29,9.3 20,10 29,10.1 1,10.4 1.6,10.4 29,11 20,11.6 28.9,18.1 29.2,20.3 28.1,24.4 28.9,24.4 28.1,25.1 28.9,25.1 30.1,25.4 28.1,25.9 28.9,25.9 30.4,27.2 27.1,27.8 30.1,27.8 30.7,27.8 28,28.4 29.2,28.4 30.4,28.4 32.2,29.6 32.8,29.6 33.4,29.6 34,29.6 29.8,30.799 30.4,30.799 31,30.799 31.6,30.799 32.2,30.799 32.8,30.799 34,30.799 36.4,30.799 40,30.799 40.6,30.799 41.8,30.799 42.4,30.799 44.8,30.799 45.4,30.799 30.1,31.399 30.7,31.399 31.3,31.399 31.9,31.399 32.5,31.399 33.1,31.399 33.7,31.399 34.3,31.399 34.9,31.399 35.5,31.399 36.1,31.399 40.9,31.399 41.5,31.399 45.1,31.399 29.8,31.999 30.4,31.999 31,31.999 31.6,31.999 32.2,31.999 32.8,31.999 33.4,31.999 34,31.999 34.6,31.999 35.2,31.999 35.8,31.999 36.4,31.999 37,31.999 37.6,31.999 38.2,31.999 38.8,31.999 39.4,31.999 40,31.999 40.6,31.999 41.2,31.999 30.1,32.599 30.7,32.599 31.3,32.599 31.9,32.599 32.5,32.599 33.1,32.599 33.7,32.599 34.3,32.599 34.9,32.599 35.5,32.599 36.1,32.599 36.7,32.599 37.3,32.599 37.9,32.599 38.5,32.599 39.1,32.599 39.7,32.599 40.3,32.599 40.9,32.599 41.5,32.599 29.8,33.199 30.4,33.199 31,33.199 31.6,33.199 32.2,33.199 32.8,33.199 33.4,33.199 34,33.199 34.6,33.199 35.2,33.199 35.8,33.199 36.4,33.199 37,33.199 37.6,33.199 38.2,33.199 38.8,33.199 39.4,33.199 40,33.199 40.6,33.199 41.2,33.199 30.1,33.799 30.7,33.799 31.3,33.799 31.9,33.799 32.5,33.799 33.1,33.799 33.7,33.799 34.3,33.799 34.9,33.799 35.5,33.799 36.1,33.799 36.7,33.799 37.3,33.799 37.9,33.799 38.5,33.799 39.1,33.799 39.7,33.799 40.3,33.799 40.9,33.799 41.5,33.799 42.1,33.799 45.1,33.799
  other v2: 2.5,0.9 47.365,1.07 1.369,1.369 3.631,1.369 46.234,1.538 48.497,1.538 0.9,2.5 4.1,2.5 45.765,2.67 48.965,2.67 1.369,3.631 3.631,3.631 46.234,3.801 48.497,3.801 2.5,4.1 47.365,4.27 2.5,30.9 47.5,30.9 1.369,31.369 3.631,31.369 46.369,31.369 48.631,31.369 0.9,32.5 4.1,32.5 45.9,32.5 49.1,32.5 1.369,33.631 3.631,33.631 46.369,33.631 48.631,33.631 2.5,34.1 47.5,34.1
HSU: D3.1 R1.2 U1.33 | length 29.2
  1-SIG-TOP w0.203: U1.33@22.68,23.15 24.403,23.15 v1(24.421,23.132) ; v1(26.8,17.2) 29.605,17.2 32.028,14.777 32.028,14.3 32.028,14.198 ccw(c32.256,14.198) 32.256,13.97 32.526,13.97 cw(c32.526,13.741) 32.755,13.741 cw(c32.526,13.741) 32.526,13.513 32.182,13.513 ccw(c32.182,13.284) 31.954,13.284 ccw(c32.182,13.284) 32.182,13.056 32.483,13.056 cw(c32.483,12.827) 32.711,12.827 cw(c32.483,12.827) 32.483,12.599 32.256,12.599 ccw(c32.256,12.37) 32.028,12.37 32.028,11.393 32.028,10.272 33.1,9.2 33.9,9.2 34.1,9.4 D3.1@34.1,10 34.1,11 34.6,11.5 R1.2@37.28,11.5
  4-SIG-BOT w0.203: v1(24.421,23.132) 24.421,19.579 v1(26.8,17.2)
HSV: D5.1 R11.2 U1.29 | length 20.3
  1-SIG-TOP w0.152: U1.29@22.68,21.15 25.75,21.15 27.006,22.406 v1(27.494,22.406) ; v1(30.6,21) v1@30.629,20.971
  1-SIG-TOP w0.2: v1(30.6,21) 30.6,20.86 30.6,20.4 30.753,20.247 ccw(c30.913,20.408) 30.913,20.181 30.927,20.181 cw(c30.927,19.954) 30.927,19.727 ccw(c30.927,19.5) 30.7,19.5 30.7,18.946 30.7,18.466 31.366,17.8 32.5,17.8 33.4,17.8 33.6,18 D5.1@33.6,18.477 33.6,19.5 34.1,20 R11.2@36.78,20
  4-SIG-BOT w0.2: v1(27.494,22.406) 29.194,22.406 v1(30.6,21)
HSW: D1.1 R3.2 U1.25 | length 19.3
  1-SIG-TOP w0.203: U1.25@22.68,19.15 25.65,19.15 v1@26.1,19.6 ; v1(26.6,21.2) 27,21.2 31.553,25.753 33.353,25.753 33.6,26 D1.1@33.6,26.5 33.6,27.6 34,28 R3.2@36.78,28
  4-SIG-BOT w0.203: v1@26.1,19.6 26.6,20.1 v1(26.6,21.2)
  other v1: 26.101,19.599
I2C.SCL: R19.1 TP12.1 U1.40 U2.1 | length 25.9
  1-SIG-TOP w0.152: v1(7.655,32.345) 7.995,32.005 13.795,32.005 16.11,29.69 19.372,29.69 20.06,29.003 20.06,27.671 20.352,27.379 20.352,25.96 20.45,25.862 U1.40@20.45,25.38
  4-SIG-BOT w0.152: v1(7.655,32.345) 7.638,32.362 6.995,32.362 6.621,31.988 6.621,28.904 7.1,28.425 R19.1@7.1,28.4 7.182,28.318 8.387,28.318 TP12.1@8.469,28.236 8.459,28.227 8.459,26.319 U2.1@8.45,26.31
I2C.SDA: R18.1 TP13.1 U1.41 U2.2 | length 24.9
  1-SIG-TOP w0.152: v1(7.194,31.883) 7.377,31.7 13.669,31.7 15.983,29.386 19.245,29.386 19.755,28.876 19.755,27.545 20.048,27.252 20.048,25.96 19.95,25.862 U1.41@19.95,25.38
  4-SIG-BOT w0.152: R18.1@7.1,29.7 R18.1@7.119,29.719 ; v1(7.194,31.883) 7.147,31.837 7.147,29.747 R18.1@7.119,29.719 ; U2.2@8.95,26.31 8.938,26.322 8.938,27.211 9.197,27.47 9.197,29.03 TP13.1@8.49,29.737 8.471,29.719 R18.1@7.119,29.719
INT: D10.1 INT.1 P2.3 R44.1 U1.5 | length 45
  1-SIG-TOP w0.152: v1(3.439,13.647) 3.462,13.624 4.076,13.624 R44.1@4.1,13.6 4.1,12.05 D10.1@4.05,12 4.848,11.202 5.769,11.202 5.914,11.348 5.914,11.914 INT.1@6,12 6,11.424 6.221,11.202 6.529,11.202 7.255,10.476 7.255,9.532 7.021,9.298 7.021,9.29 6.3,8.569 6.3,5.3 8.095,3.505 10.274,3.505 10.779,4.01 10.779,6.271 P2.3@10.75,6.3 ; v1(7.522,12.246) 8.275,11.493 v1(8.812,11.493) ; v1(13.861,22.209) 14.302,22.65 U1.5@15.72,22.65
  1-SIG-TOP w0.25: R44.1@4.075,13.575 R44.1@4.1,13.6
  4-SIG-BOT w0.152: v1(3.439,13.647) 3.8,13.286 3.8,12 4.3,11.5 6.776,11.5 v1(7.522,12.246) ; v1@8.801,11.482 v1@8.793,11.49 ; v1(8.812,11.493) 8.793,11.513 v1@8.793,11.49 ; v1(13.861,22.209) 13.955,22.209 14.238,21.926 14.374,21.926 15.102,21.198 15.102,18.3 14.957,18.155 14.957,17.379 14.905,17.327 14.905,16.774 9.621,11.49 v1@8.793,11.49
LSU: D4.1 R2.2 U1.36 | length 29.2
  1-SIG-TOP w0.152: U1.36@22.68,24.65 23.351,24.65 v1(23.746,25.045)
  1-SIG-TOP w0.2: v1(26.1,16.7) 26.102,16.698 29.502,16.698 31.6,14.6 31.6,10.095 32.923,8.772 33.928,8.772 34.1,8.6 D4.1@34.1,8 34.1,7.4 34.7,6.8 R2.2@37.28,6.8
  4-SIG-BOT w0.2: v1(23.746,25.045) 23.746,19.054 v1(26.1,16.7)
LSV: D6.1 R12.2 U1.32 | length 20.3
  1-SIG-TOP w0.152: U1.32@22.68,22.65 25.925,22.65 v1(26.022,22.553)
  1-SIG-TOP w0.2: v1(30,20.3) 30.3,20 30.3,18.368 30.659,18.009 31.27,17.398 31.44,17.398 cw(c31.44,17.171) 31.667,17.171 31.667,17.051 ccw(c31.894,17.051) 32.121,17.051 32.121,17.171 cw(c32.348,17.171) 32.348,17.398 32.893,17.398 33.402,17.398 33.6,17.2 D6.1@33.6,16.632 33.6,15.7 33.975,15.325 R12.2@36.78,15.325
  4-SIG-BOT w0.2: v1(26.022,22.553) 26.671,21.904 27.702,21.904 27.852,22.054 29.048,22.054 30,21.102 v1(30,20.3)
LSW: D2.1 R4.2 U1.28 | length 21.2
  1-SIG-TOP w0.203: U1.28@22.68,20.65 23.825,20.65 23.86,20.685 25.468,20.685 25.503,20.65 27.091,20.65 29.242,22.802 29.547,23.107 cw(c29.691,22.963) 29.835,23.107 30.237,22.704 ccw(c30.354,22.821) 30.47,22.704 ccw(c30.354,22.821) 30.47,22.938 29.972,23.436 cw(c30.089,23.553) 29.972,23.669 cw(c30.089,23.553) 30.205,23.669 30.651,23.224 ccw(c30.768,23.34) 30.884,23.224 ccw(c30.768,23.34) 30.884,23.457 30.535,23.807 cw(c30.678,23.95) 30.535,24.094 31.126,24.686 31.741,25.3 33.3,25.3 33.4,25.3 33.6,25.1 D2.1@33.6,24.5 33.6,23.4 34,23 R4.2@36.78,23
NetC14_2: C14.2 NT7.2 U1.10 | length 3.8
  1-SIG-TOP w0.152: NT7.2@13.02,18.5 13.02,19.22 C14.2@13.1,19.3 13.8,19.3 14.5,20 15.1,20 15.209,20.109 15.679,20.109 U1.10@15.72,20.15
NetC17_1: C17.1 U1.35 | length 1.5
  1-SIG-TOP w0.25: U1.35@22.68,24.15 22.682,24.152 24.152,24.152 C17.1@24.2,24.2
NetC18_2: C18.2 U1.31 | length 1.5
  1-SIG-TOP w0.25: U1.31@22.68,22.15 22.682,22.148 24.176,22.148 C18.2@24.178,22.146
NetC19_2: C19.2 U1.27 | length 1.5
  1-SIG-TOP w0.203: U1.27@22.68,20.15 22.683,20.153 24.161,20.153 C19.2@24.164,20.156
NetD1_2: D1.2 R35.1 | length 1.6
  1-SIG-TOP w0.25: D1.2@36.4,26.5 R35.1@38,26.5
NetD2_2: D2.2 R32.1 | length 1.6
  1-SIG-TOP w0.2: D2.2@36.4,24.5 R32.1@38,24.5
NetD3_2: D3.2 R39.1 | length 1.6
  1-SIG-TOP w0.2: D3.2@36.9,10 R39.1@38.5,10
NetD4_2: D4.2 R38.1 | length 1.6
  1-SIG-TOP w0.2: D4.2@36.9,8 R38.1@38.5,8
NetD5_2: D5.2 R37.1 | length 1.6
  1-SIG-TOP w0.2: D5.2@36.4,18.477 36.423,18.5 R37.1@38,18.5
NetD6_2: D6.2 R36.1 | length 1.6
  1-SIG-TOP w0.2: D6.2@36.4,16.632 36.409,16.623 R36.1@38,16.623
NetD8_1: D8.1 L1.2 U1.9 | length 9
  1-SIG-TOP w0.25: D8.1@11.63,25 11.63,22.03 L1.2@11.5,21.9 11.5,21.05 12.229,20.321 12.229,20.301 12.634,19.895 13.695,19.895 14.3,20.5 14.6,20.5 14.75,20.65 U1.9@15.72,20.65
NetNT8_2: NT8.2 U1.20 | length 1
  1-SIG-TOP w0.152: U1.20@19.95,18.42 19.958,18.412 NT8.2@19.958,17.431
NetQ1_1G: Q1.1G R1.1 R39.2 R51.1 | length 7
  1-SIG-TOP w0.25: v1(38.217,12.123) 38.28,12.06 R1.1@38.28,11.5 39.1,11.5 39.5,11.1 R39.2@39.5,10
  4-SIG-BOT w0.25: v1(38.217,12.123) 38.169,12.075 37.675,12.075 37.5,11.9 R51.1@37.5,11.012 38.388,11.012 38.58,10.82 Q1.1G@39.62,10.82
NetQ1_2G: Q1.2G R2.1 R38.2 R50.1 | length 7
  1-SIG-TOP w0.25: v1(38.194,9.062) 38.455,8.8 39.4,8.8 39.5,8.7 R38.2@39.5,8 39.5,7.2 39.1,6.8 R2.1@38.28,6.8
  4-SIG-BOT w0.25: R50.1@37.5,8.972 v1@38.028,8.972 ; v1(38.194,9.062) 38.126,9.062 38.036,8.972 v1@38.028,8.972 ; Q1.2G@39.62,8.28 39.6,8.3 38.7,8.3 v1@38.028,8.972
NetQ2_1G: Q2.1G R3.1 R35.2 R47.1 | length 6.5
  1-SIG-TOP w0.25: R3.1@37.78,28 38.5,28 ; v1(38.499,28.409) 38.5,28 ; R35.2@39,26.5 39,27.7 38.7,28 38.5,28
  4-SIG-BOT w0.25: R47.1@37.5,28 37.59,27.91 38.999,27.91 ; v1(38.499,28.409) 38.999,27.91 ; 38.999,27.91 39.53,27.91 Q2.1G@39.62,27.82 39.089,27.82 38.999,27.91
NetQ2_2G: Q2.2G R4.1 R32.2 R46.1 | length 5.8
  1-SIG-TOP w0.25: R4.1@37.78,23 38.6,23 39,23.4 R32.2@39,24.5 38.875,24.625 38.875,24.744 38.823,24.796 v1(38.823,25.304)
  4-SIG-BOT w0.25: R46.1@37.5,26 37.525,26 38.245,25.28 v1@38.847,25.28 ; v1(38.823,25.304) v1@38.847,25.28 ; Q2.2G@39.62,25.28 v1@38.847,25.28
NetQ3_1G: Q3.1G R11.1 R37.2 R49.1 | length 7.7
  1-SIG-TOP w0.25: v1(37.774,20.907) 37.777,20.904 37.777,20.003 R11.1@37.78,20 38.5,20 39,19.5 R37.2@39,18.5
  4-SIG-BOT w0.25: R49.1@37.443,19.915 37.533,19.825 Q3.1G@39.473,19.825 ; v1(37.774,20.907) 38.391,20.907 Q3.1G@39.473,19.825 ; Q3.1G@39.563,19.735 Q3.1G@39.473,19.825
NetQ3_2G: Q3.2G R12.1 R36.2 R48.1 | length 6.6
  1-SIG-TOP w0.25: R12.1@37.78,15.325 38.625,15.325 39,15.7 R36.2@39,16.623 38.875,16.748 38.875,16.872 38.828,16.919 v1(38.828,17.465)
  4-SIG-BOT w0.25: R48.1@37.443,17.915 37.985,17.915 38.8,17.1 39.468,17.1 Q3.2G@39.563,17.195 39.098,17.195 v1(38.828,17.465)
NRST: C16.2 D9.1 R42.1 R43.1 U1.7 X1.3 | length 32.1
  1-SIG-TOP w0.152: v1(14.169,21.447) 14.235,21.514 14.587,21.514 14.724,21.65 U1.7@15.72,21.65 ; v1(17.345,30.95) 17.349,30.954 17.349,30.993 17.737,30.605 19.75,30.605 ; 19.828,30.528 19.75,30.605 ; X1.3@20.9,33.235 21.009,33.344 21.009,33.781 21.564,34.337 23.263,34.337 24.424,33.176 v1(24.424,29.382) ; D9.1@22.35,27.98 22.35,28.82 v1@22.432,28.902 ; v1(22.483,28.902) v1@22.432,28.902 ; 19.75,30.605 20.755,29.6 21.3,29.6 21.998,28.902 v1@22.432,28.902
  4-SIG-BOT w0.152: R42.1@8.954,17.169 8.979,17.169 9.843,18.033 9.933,18.033 C16.2@10.1,18.2 C16.2@10.081,18.2 ; v1(9.75,18.627) 9.706,18.583 9.706,18.404 9.909,18.2 C16.2@10.081,18.2 ; C16.2@9.908,18.392 9.908,18.373 C16.2@10.081,18.2 ; v1(11.3,26.7) 11.3,27.8 12.7,29.2 15.2,29.2 16.1,30.1 17,30.1 17.279,30.379 17.279,30.883 v1(17.345,30.95) ; v1(22.483,28.902) 22.55,28.968 22.55,29.25 22.8,29.5 24.306,29.5 v1(24.424,29.382)
  4-SIG-BOT w0.25: C16.2@10.1,18.2 R43.1@11.2,18.2
OCCOMP: C12.2 R7.2 R23.2 R29.2 R31.1 U1.24 | length 6.1
  1-SIG-TOP w0.152: R31.1@20.8,15.6 C12.2@20.8,14.6 R7.2@21.9,14.6 R23.2@21.9,15.6 R29.2@21.9,16.6 ; R29.2@21.925,16.625 R29.2@21.9,16.6 ; U1.24@21.925,18.395 U1.24@21.95,18.42 22.001,18.369 22.001,17.839 22.108,17.731 22.108,17.228 21.9,17.019 R29.2@21.9,16.6
OP1N: C5.1 R14.2 R28.1 U1.22 | length 7.5
  1-SIG-TOP w0.152: v1(20.944,17.533) 20.949,17.528 U1.22@20.95,18.42 U1.22@20.95,18.42
  4-SIG-BOT w0.152: v1(20.944,17.533) 20.944,16.425 21.784,15.584 21.874,15.495 22.205,15.495 22.5,15.2 R28.1@22.5,14 C5.1@22.5,12.9 R14.2@23.6,12.9
OP1O: C5.2 NT5.1 R28.2 U1.21 | length 6.5
  1-SIG-TOP w0.152: NT5.1@20.448,16.995 20.448,17.252 ; 20.448,17.3 20.448,17.252 ; U1.21@20.45,18.42 20.448,18.419 20.448,17.252 ; v1(21.35,15.113) 21.35,16.35 20.705,16.995 20.448,17.252
  4-SIG-BOT w0.152: v1(21.35,15.113) 21.35,15.227 21.5,15.077 R28.2@21.5,14 C5.2@21.5,12.9
OP1P: R6.2 R21.2 R22.1 U1.23 | length 7.5
  1-SIG-TOP w0.152: U1.23@21.45,18.42 21.45,17.713 v1(21.63,17.533)
  4-SIG-BOT w0.152: v1(21.63,17.533) 21.63,17.523 21.63,17.186 ccw(c21.833,17.186) 21.833,16.983 21.964,16.983 cw(c21.964,16.78) 21.964,16.577 21.833,16.577 ccw(c21.833,16.374) 21.63,16.374 21.63,16.17 21.807,15.993 22,15.8 23.361,15.8 23.467,15.906 23.486,15.906 R21.2@23.659,16.079 ; R6.2@23.6,14 23.63,14.03 23.63,15.068 R22.1@23.659,15.098 R21.2@23.659,16.079 ; R21.2@23.659,16.098 R21.2@23.659,16.079
OP2N: C4.1 R13.2 R27.1 U1.2 | length 3.5
  1-SIG-TOP w0.152: v1(14.963,24.167) 14.972,24.158 15.712,24.158 U1.2@15.72,24.15
  4-SIG-BOT w0.152: R27.1@13.7,25 13.867,24.833 13.867,24.533 13.9,24.5 C4.1@13.9,24 14.619,24 R13.2@14.9,23.719 ; R13.2@14.9,23.7 R13.2@14.9,23.719 ; v1(14.963,24.167) 14.9,24.104 R13.2@14.9,23.719
OP2O: C4.2 NT4.1 R27.2 U1.3 | length 15.7
  1-SIG-TOP w0.152: v1(13.231,25.632) 13.598,25.264 13.598,24.302 14.25,23.65 U1.3@15.72,23.65 ; v1(15.928,17.887) 16.333,17.481 NT4.1@16.333,16.671
  4-SIG-BOT w0.152: R27.2@12.687,24.987 R27.2@12.7,25 ; v1(13.231,25.632) 13.165,25.565 12.836,25.565 12.7,25.429 R27.2@12.7,25 ; v1(15.928,17.887) 15.928,22.473 15.4,23 14.288,23 13.875,23 12.9,23.975 C4.2@12.9,24 12.9,24.031 12.7,24.231 R27.2@12.7,25
OP2P: R5.2 R17.2 R20.1 U1.1 | length 3.6
  1-SIG-TOP w0.152: v1(14.9,25.3) 14.967,25.233 14.967,25.124 15.441,24.65 U1.1@15.72,24.65
  4-SIG-BOT w0.152: R17.2@13.7,26.2 R20.1@14.9,26.2 R5.2@14.9,25
OP3N: C6.1 R16.2 R30.1 U1.46 | length 6.8
  1-SIG-TOP w0.152: U1.46@17.45,25.38 17.45,25.862 17.548,25.96 17.548,26.551 17.548,26.641 ccw(c17.344,26.641) 17.358,26.844 17.148,26.858 cw(c17.162,27.061) 16.959,27.074 cw(c17.162,27.061) 17.175,27.263 17.341,27.252 ccw(c17.355,27.455) 17.498,27.311 17.74,27.553 17.74,27.97 v1(17.74,28.423) v1@17.773,28.423
  4-SIG-BOT w0.152: v1(17.74,28.423) 17.74,28.466 17.8,28.406 R30.1@17.8,27.9 C6.1@17.8,26.9 17.85,26.85 18.85,26.85 R16.2@18.9,26.8
OP3O: C6.2 NT6.1 R30.2 U1.47 | length 23.8
  1-SIG-TOP w0.152: v1(15.435,17.459) 15.557,17.58 15.729,17.408 15.779,17.408 15.779,16.209 15.771,16.202 15.771,15.598 15.779,15.591 15.779,15.5 16.107,15.171 16.202,15.171 16.473,14.9 NT6.1@16.6,14.9 ; U1.47@16.95,25.38 v1@16.95,26.253 ; v1@16.951,26.253 16.989,26.253 v1(17.016,26.227)
  4-SIG-BOT w0.152: v1(15.435,17.459) 15.435,19.413 15.623,19.6 15.623,22.277 15.205,22.695 13.55,22.695 12.768,23.477 12.626,23.477 12.1,24.003 12.1,26.6 14.1,28.6 15.623,28.6 15.702,28.679 16.098,28.679 16.379,28.398 16.379,28.321 16.608,28.092 16.627,28.092 16.8,27.919 C6.2@16.8,26.9 16.949,26.751 16.949,26.293 v1(17.016,26.227)
OP3P: R8.2 R24.2 R25.1 U1.45 | length 6.8
  1-SIG-TOP w0.152: U1.45@17.95,25.38 17.95,25.862 17.852,25.96 17.852,25.982 17.852,26.569 cw(c18.056,26.569) 18.054,26.772 18.348,26.775 ccw(c18.346,26.978) 18.549,26.98 ccw(c18.346,26.978) 18.344,27.181 18.25,27.18 cw(c18.248,27.383) 18.045,27.383 18.045,27.789 18.045,27.9 18.514,28.369 18.514,28.377 18.527,28.39 18.85,28.39 v1(18.916,28.457)
  4-SIG-BOT w0.152: R24.2@17.8,29.1 R25.1@18.9,29.1 18.908,29.092 18.908,28.481 v1@18.9,28.473 ; R8.2@18.9,27.9 18.908,27.908 18.908,28.449 v1(18.916,28.457)
PA1: R54.1 U1.12 | length 3.1
  1-SIG-TOP w0.152: v1(13.668,18.739) 14.639,18.739 15.05,19.15 U1.12@15.72,19.15
  4-SIG-BOT w0.25: R54.1@13.4,18.2 13.62,18.2 13.807,18.387 13.668,18.527 v1(13.668,18.739)
PA2: R56.1 U1.13 | length 3.8
  1-SIG-TOP w0.152: v1(14.03,17.007) 14.038,17.007 14.038,17.152 14.09,17.1 14.4,17.1 15.72,18.42 U1.13@16.45,18.42
  4-SIG-BOT w0.152: R56.1@13.4,17.1 13.451,17.049 13.987,17.049 v1(14.03,17.007)
PA3: NT5.2 PA3.1 U1.14 | length 9.5
  1-SIG-TOP w0.152: U1.14@16.95,18.42 16.968,18.402 16.968,17.477 v1(16.986,17.459) ; v1(20.409,16.221) 20.409,16.188 20.446,16.15 20.448,16.153 NT5.2@20.448,16.64
  4-SIG-BOT w0.152: PA3.1@15.908,16.648 16.081,16.648 16.892,17.459 v1(16.986,17.459) 16.986,18.256 17.43,18.7 19.8,18.7 20.409,18.091 v1(20.409,16.221)
PA4: NT4.2 PA4.1 U1.15 | length 3.3
  1-SIG-TOP w0.152: PA4.1@16.5,15.9 16.5,16.1 17.071,16.671 ; NT4.2@16.689,16.671 17.071,16.671 ; U1.15@17.45,18.42 17.45,17.682 17.464,17.668 17.464,17.064 17.071,16.671
PA5: NT6.2 PA5.1 U1.16 | length 4.3
  1-SIG-TOP w0.152: NT6.2@16.956,14.9 17.567,14.9 17.914,15.248 17.914,15.814 PA5.1@18,15.9 18.005,15.905 18.005,16.893 v1(18.009,16.897) 17.95,16.956 U1.16@17.95,18.42
PA6: R52.1 U1.17 | length 4.2
  1-SIG-TOP w0.2: U1.17@18.45,18.42 18.45,17.55 v1(18.5,17.5)
  4-SIG-BOT w0.2: R52.1@16.3,15.5 16.325,15.5 16.475,15.65 16.475,15.675 17.507,16.707 17.507,17.105 17.801,17.4 18.2,17.4 18.243,17.443 18.443,17.443 v1(18.5,17.5)
PA7: R55.1 U1.18 | length 3.8
  1-SIG-TOP w0.2: v1(18.738,16.633) 18.95,16.845 18.95,17.24 19.002,17.292 19.002,17.708 18.95,17.761 U1.18@18.95,18.42
  4-SIG-BOT w0.2: R55.1@17.3,15.5 17.325,15.5 18.4,16.575 18.681,16.575 v1(18.738,16.633)
PF0: R53.1 U1.4 | length 4.3
  1-SIG-TOP w0.152: v1@12.469,22.542 12.501,22.574 12.501,22.798 12.696,22.993 12.882,23.179 13.518,23.179 13.547,23.15 U1.4@15.72,23.15
  4-SIG-BOT w0.152: R53.1@12.061,22.583 12.578,22.583 12.591,22.571 v1(12.523,22.571)
PIN#2: D9.4 U1.37 X1.2 | length 8.6
  1-SIG-TOP w0.152: U1.37@21.95,25.38 21.95,25.834 v1(22.363,26.247) ; X1.2@22.17,31.965 22.227,31.908 22.792,31.908 23.65,31.05 D9.4@23.65,29.82 23.65,29.134 v1(23.798,28.986)
  4-SIG-BOT w0.152: v1(22.363,26.247) 22.098,26.512 22.098,27.298 23.2,28.4 23.236,28.4 23.798,28.962 v1(23.798,28.986)
PIN#4: D9.5 NT9.1 U1.38 X1.4 | length 9.8
  1-SIG-TOP w0.152: X1.4@20.9,31.965 21.665,31.2 22.5,31.2 23,30.7 D9.5@23,29.82 23,29.414 23.146,29.268 v1(23.146,28.986) ; U1.38@21.45,25.38 21.45,26.345 v1@21.474,26.37 ; NT9.1@21.474,26.82 v1@21.474,26.37 ; v1@21.475,26.37 21.529,26.316 v1(21.529,26.291) 21.474,26.346 v1@21.474,26.37
  4-SIG-BOT w0.152: 21.697,26.585 21.697,26.553 21.529,26.385 v1(21.529,26.291) 21.794,26.555 21.794,27.425 23.146,28.777 v1(23.146,28.986)
PIN#6: D9.6 X1.6 | length 4
  1-SIG-TOP w0.152: X1.6@19.63,31.965 19.744,31.965 20.909,30.8 22,30.8 22.3,30.5 22.3,29.87 D9.6@22.35,29.82
RESERVED: U1.43
RESET: P4.4 R42.2 RST.1 U2.3 | length 19.4
  1-SIG-TOP w0.152: P4.4@9.25,28.7 9.328,28.778 v1(9.328,30.72)
  4-SIG-BOT w0.152: RST.1@8.5,31.3 8.748,31.3 v1(9.328,30.72) 9.328,29.33 9.502,29.156 9.502,27.998 ; R42.2@8.954,18.169 8.8,18.322 8.8,23.098 9.502,23.8 10.4,23.8 10.739,24.139 10.739,25.392 10.848,25.502 10.848,25.898 10.713,26.034 10.713,26.787 9.502,27.998 ; U2.3@9.45,26.31 9.45,26.85 9.502,26.902 9.502,27.998
RST_IN: P3.4 U2.6 | length 8.1
  1-SIG-TOP w0.152: P3.4@6.2,19.45 7.85,19.45 v1(7.9,19.5)
  4-SIG-BOT w0.152: v1(7.9,19.5) 7.967,19.567 8.277,19.567 8.479,19.768 8.479,23.279 9.4,24.2 9.4,25.04 U2.6@9.45,25.09
SCL_IN: P3.1 U2.8 | length 4.5
  1-SIG-TOP w0.152: P3.1@6.2,23.95 6.326,23.95 6.6,24.224 v1(6.6,26)
  4-SIG-BOT w0.152: v1(6.6,26) 7.023,26 7.933,25.09 U2.8@8.45,25.09
SDA_IN: P3.2 U2.7 | length 4.3
  1-SIG-TOP w0.152: P3.2@6.2,22.45 7.1,22.45 8.033,23.383 8.033,23.533 v1(8.1,23.6)
  4-SIG-BOT w0.152: v1(8.1,23.6) 8.95,24.45 U2.7@8.95,25.09
SENSE1_N: NT1.1 R14.1 | length 12
  4-SIG-BOT w0.152: R14.1@24.6,12.9 24.926,12.9 25.273,13.247 25.7,13.247 26.182,13.247 cw(c26.182,13.044) 26.385,13.044 26.385,12.912 ccw(c26.588,12.912) 26.588,12.709 ccw(c26.588,12.912) 26.791,12.912 26.791,13.044 cw(c26.994,13.044) 26.994,13.247 29.965,13.247 30.153,13.247 31.3,12.1 31.3,9.4 30.9,9 NT1.1@30.2,9
SENSE1_P: Q1.2S R6.1 R7.1 R9.2 R50.2 | length 30.7
  1-SIG-TOP w0.152: R7.1@22.9,14.6 23.548,15.248 25.852,15.248 27.9,13.2 30,13.2 30.898,14.098 v1(30.898,14.19)
  4-SIG-BOT w0.152: R6.1@24.6,14 24.926,14 25.273,13.653 30.321,13.653 31.706,12.268 31.706,9.394 32.1,9 R9.2@34.4,9 34,9.4 32.4,9.4 32.1,9.7 32.1,12.989 v1(30.898,14.19)
SENSE2_N: NT3.1 R13.1 | length 24.9
  4-SIG-BOT w0.152: R13.1@15.9,23.7 16.226,23.7 16.724,24.198 21.829,24.198 22.986,25.355 23.315,25.685 24.376,25.685 cw(c24.376,25.533) 24.528,25.531 24.528,25.485 ccw(c24.667,25.484) 24.666,25.345 ccw(c24.667,25.484) 24.807,25.483 24.807,25.534 cw(c24.959,25.533) 24.959,25.685 26.415,25.685 26.417,25.683 26.492,25.608 27,25.1 27,23.769 27.585,23.185 27.674,23.095 30.805,23.095 31.4,22.5 31.4,18.2 31.1,17.9 30.75,17.9 ; NT3.1@30.166,17.9 30.75,17.9 ; 30.4,17.9 30.75,17.9
SENSE2_P: Q3.2S R5.1 R15.2 R23.1 R48.2 | length 41.1
  1-SIG-TOP w0.152: R23.1@22.9,15.6 25.208,15.6 26.1,15.6 27.985,13.715 28.195,13.505 29.505,13.505 30.037,14.037 30.037,14.963 v1(30,15)
  4-SIG-BOT w0.152: R5.1@15.9,25 16.226,25 16.724,24.502 21.702,24.502 23.1,25.9 23.189,25.989 26.542,25.989 26.631,25.9 27.305,25.226 27.305,23.895 27.8,23.4 30.931,23.4 31.615,22.715 31.705,22.626 31.705,22.2 31.705,18.205 32.009,17.9 R15.2@34.327,17.9 ; v1(30,15) 31.7,16.7 31.7,17.3 32,17.6 34.027,17.6 R15.2@34.327,17.9 ; R15.2@34.343,17.915 R15.2@34.327,17.9
SENSE3_N: NT2.1 R16.1 | length 18.5
  4-SIG-BOT w0.152: R16.1@19.9,26.8 20.298,27.198 20.826,27.198 22.005,28.376 22.005,29.405 22.5,29.9 25,29.9 25.356,29.9 cw(c25.356,29.748) 25.508,29.748 ccw(c25.648,29.748) 25.787,29.748 25.787,29.76 cw(c25.927,29.76) 26.067,29.76 ccw(c26.207,29.76) 26.346,29.76 cw(c26.486,29.76) 26.626,29.76 26.626,29.748 ccw(c26.765,29.748) 26.905,29.748 cw(c27.057,29.748) 27.057,29.9 30.188,29.9 30.4,29.9 31.4,28.9 31.4,27.1 31.4,26.5 30.9,26 NT2.1@30.3,26
SENSE3_P: Q2.2S R8.1 R10.2 R29.1 R46.2 | length 38.8
  1-SIG-TOP w0.152: R29.1@22.9,16.6 23.548,15.952 25.052,15.952 25.4,16.3 25.4,17.8 27.5,19.9 27.5,20.2 29,21.7 29.8,21.7 30.1,22 31.4,22 v1(32.2,22.8)
  4-SIG-BOT w0.152: R8.1@19.9,27.9 20.298,27.502 20.7,27.502 21.7,28.502 21.7,29.531 22.374,30.205 30.526,30.205 31.705,29.026 31.705,26.495 32.2,26 R10.2@34.4,26 34.167,25.767 32.167,25.767 31.7,25.3 31.7,23.3 v1(32.2,22.8)